# Altium PCB MachSacXa.PcbDoc
Units mil, origin at the board's own origin, x right, y up, seen from the top; angles counter-clockwise.
Board outline 8360 x 2835 mil, 2 copper layers (Top Layer, Bottom Layer); 169 components, 94 nets, 467 pads, 229 vias.
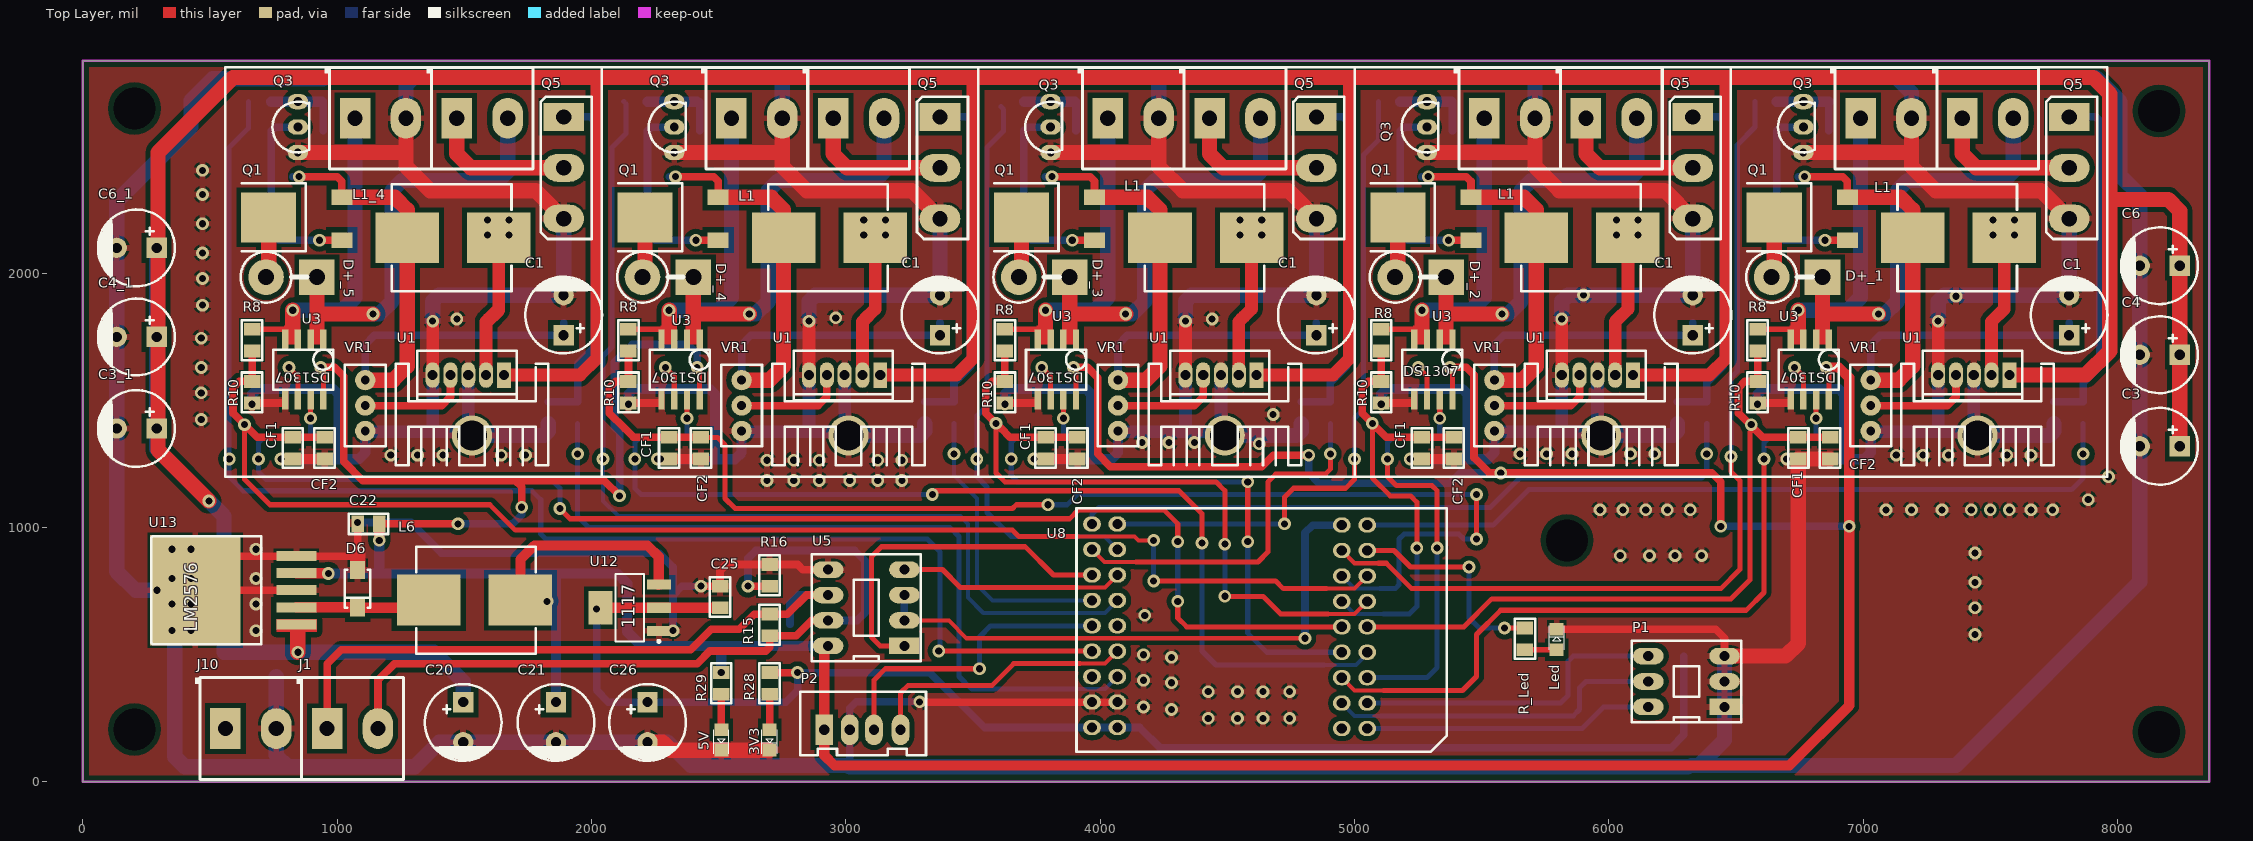
[diagram p0: Top Layer view]
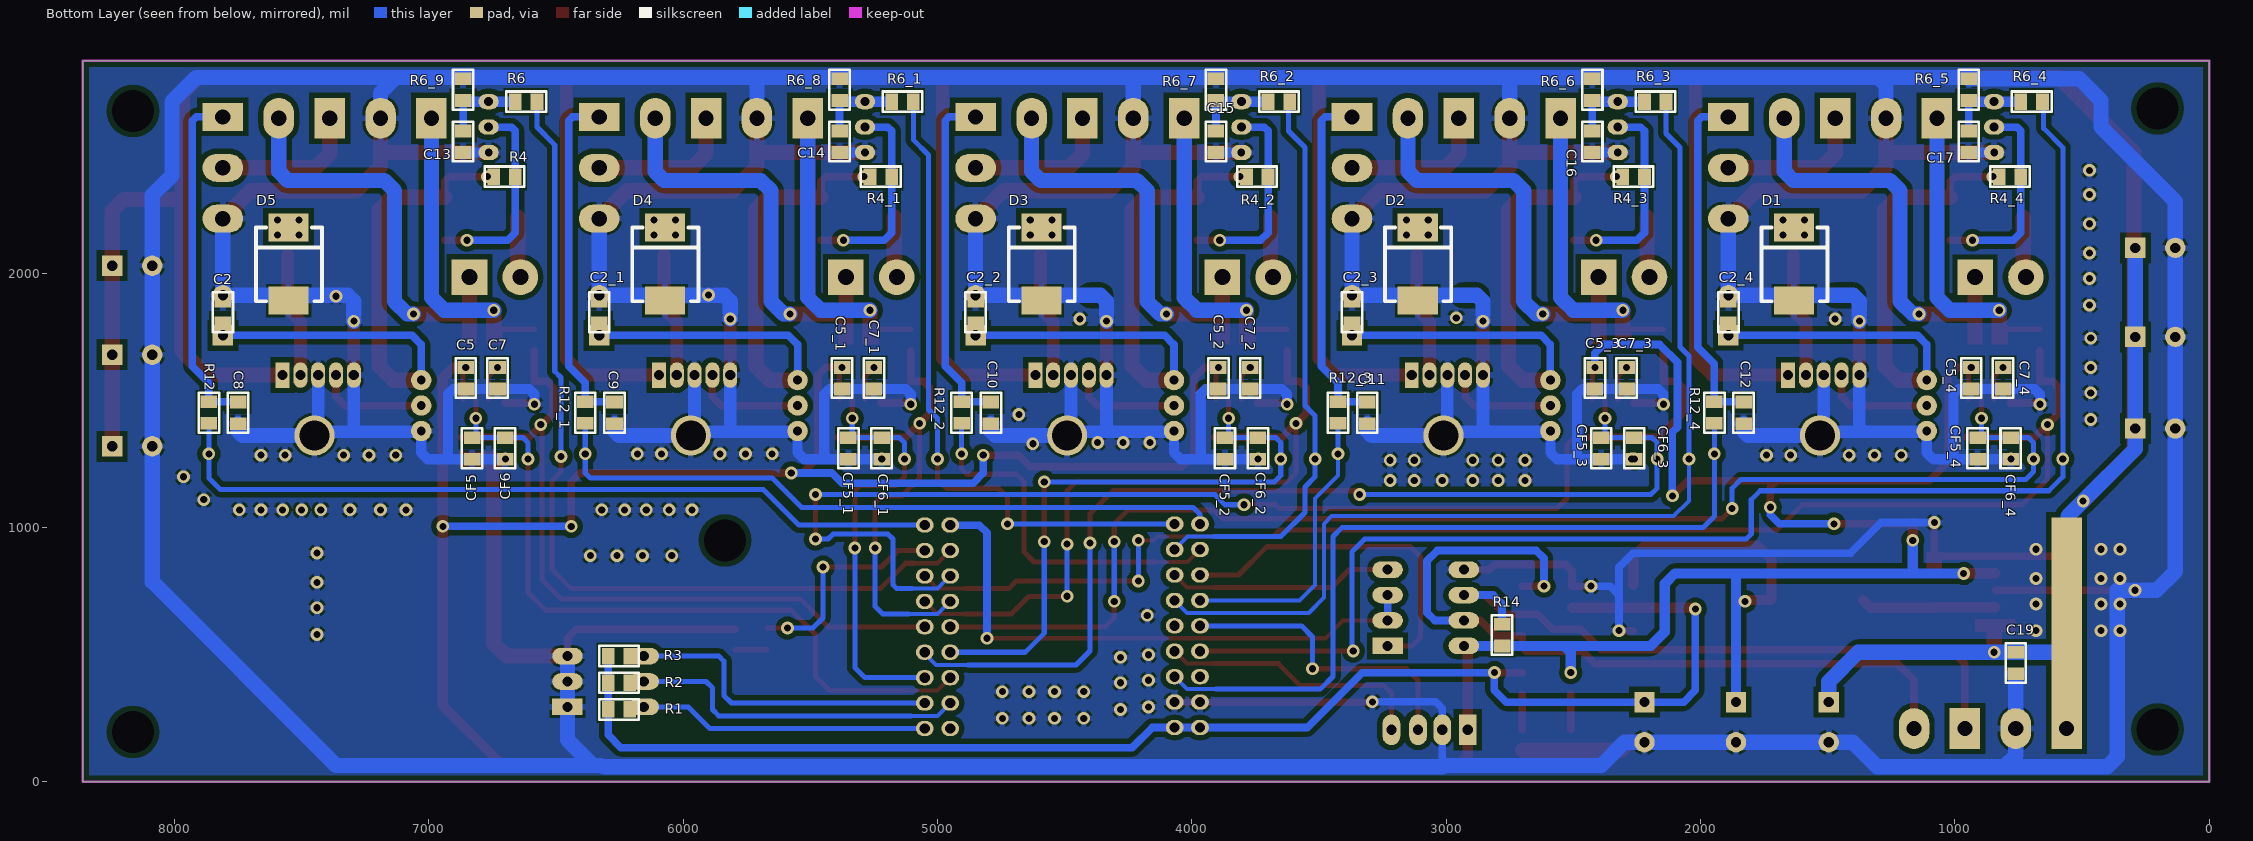
[diagram p1: Bottom Layer view, seen from below]
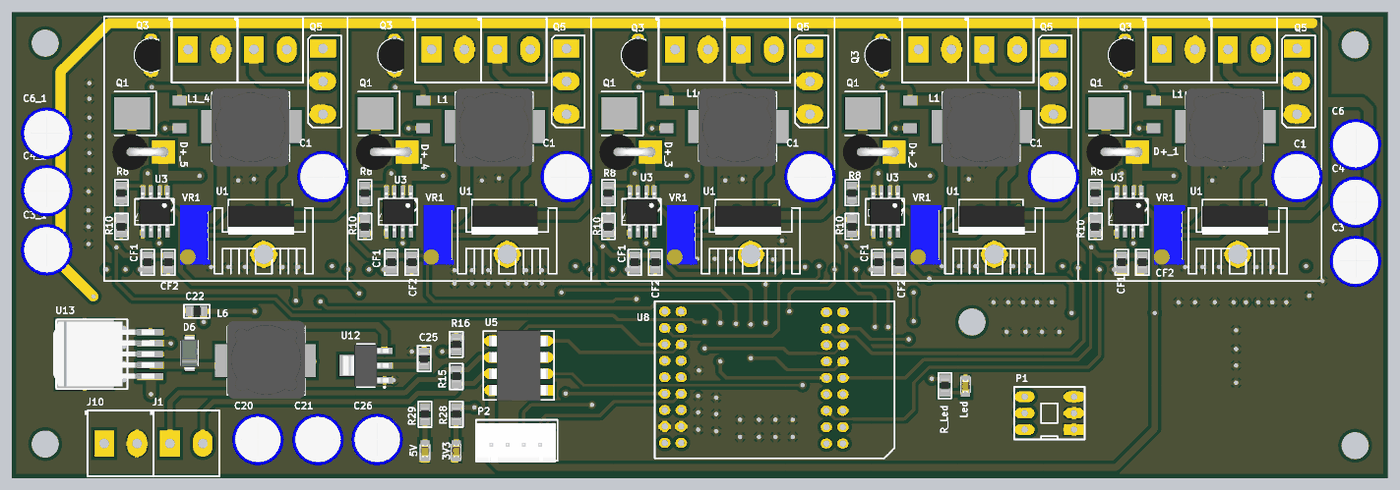
[diagram p2: 3D render of the assembled board from above, using the file's embedded part models]
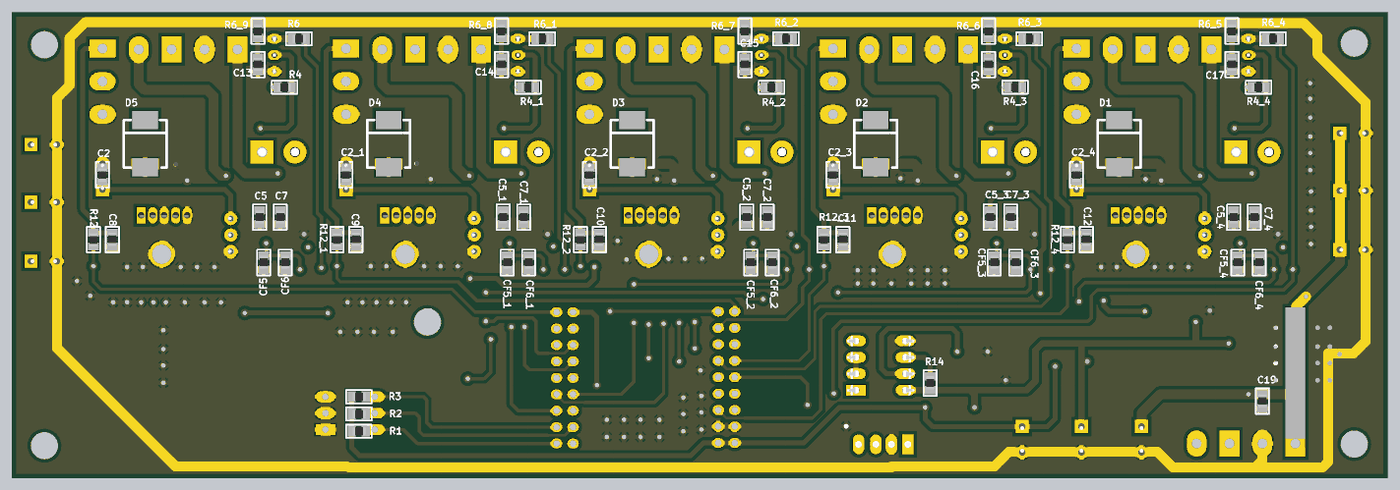
[diagram p3: 3D render of the assembled board from below, using the file's embedded part models]

## Layer stack, top to bottom
Top Solder: solder mask 0.4, Solder Resist, Dk 3.5
Top Layer: signal copper 1.4
Dielectric1: dielectric 12.6, FR-4, Dk 4.8
Bottom Layer: signal copper 1.4
Bottom Solder: solder mask 0.4, Solder Resist, Dk 3.5

## Board outline
0,2835 8360,2835 8360,0 0,0

## Design rules (kind name [scope] priority, off if disabled: settings)
Clearance [All] p1: gap=20 ignorepadtopadclearanceinfootprint=FALSE
PlaneConnect [All] p1: planeconnectstyle=Relief reliefexpansion=20 reliefentries=4 reliefconductorwidth=20 reliefairgap=10
PolygonConnect [All] p1: connectstyle=Relief reliefconductorwidth=25 reliefentries=4 polygonreliefangle="90 Angle" airgapwidth=10
RoutingVias [All] p1: holewidth=28 width=50 viastyle="Through Hole" minholewidth=28 minwidth=50 maxholewidth=28 maxwidth=50
SilkToSolderMaskClearance SilkscreenOverComponentPads [IsPad] p1: minsilkscreentomaskgap=10 clearancetoexposedcopper=TRUE
SolderMaskExpansion [All] p1: expansion=4
Width [All] p1: maxlimit=120 minlimit=14 preferedwidth=20
28 further rules are at their usual default settings.

## Classes and differential pairs
component class MachSacXa: C1 C2 C5 C7 C19 C20 C21 C22 C25 C26 CF1 CF2 CF5 CF6 D6 J1 J10 L1 L6 P1 P2 Q1 Q3 Q5 R1 R2 R3 R4 R6 R8 R10 R12 R14 R15 R16 R28 R29 U1 U3 U5 U8 U12 U13 VR1

## Components (designator, comment, footprint, x,y, rotation, side; value= is the part's Value field where it differs from the comment)
3V3 "LED" "LED_SMD (0805)" 2700,205 r270 top (schematic designator D7)
5V "LED" "LED_SMD (0805)" 2510,205 r270 top (schematic designator D8)
C1 "" C_D300 7810,1835 r90 top
C1 "" C_D300 6330,1835 r90 top
C1 "" C_D300 4850,1835 r90 top
C1 "" C_D300 3370,1835 r90 top
C1 "" C_D300 1890,1835 r90 top
C2 "104" R/C_0805 7810,1805 r90 bottom
C2_1 "104" R/C_0805 6330,1805 r90 bottom (schematic designator C2)
C2_2 "104" R/C_0805 4850,1805 r90 bottom (schematic designator C2)
C2_3 "104" R/C_0805 3370,1805 r90 bottom (schematic designator C2)
C2_4 "104" R/C_0805 1890,1805 r90 bottom (schematic designator C2)
C3 "" C_D300 8166.26,1320 r180 top (schematic designator C1)
C3_1 "" C_D300 211.26,1390 r180 top (schematic designator C1)
C4 "" C_D300 8166.26,1680 r180 top (schematic designator C1)
C4_1 "" C_D300 211.26,1750 r180 top (schematic designator C1)
C5 "104" R/C_0805 6855,1630 r270 bottom
C5_1 "104" R/C_0805 5375,1630 r270 bottom (schematic designator C5)
C5_2 "104" R/C_0805 3895,1630 r270 bottom (schematic designator C5)
C5_3 "104" R/C_0805 2415,1630 r270 bottom (schematic designator C5)
C5_4 "104" R/C_0805 935,1630 r270 bottom (schematic designator C5)
C6 "" C_D300 8166.26,2030 r180 top (schematic designator C1)
C6_1 "" C_D300 211.26,2100 r180 top (schematic designator C1)
C7 "104" R/C_0805 6730,1630 r270 bottom
C7_1 "104" R/C_0805 5250,1630 r270 bottom (schematic designator C7)
C7_2 "104" R/C_0805 3770,1630 r270 bottom (schematic designator C7)
C7_3 "104" R/C_0805 2290,1630 r270 bottom (schematic designator C7)
C7_4 "104" R/C_0805 810,1630 r270 bottom (schematic designator C7)
C8 "104" R/C_0805 7750,1493.74 r270 bottom (schematic designator C2)
C9 "104" R/C_0805 6270,1493.74 r270 bottom (schematic designator C2)
C10 "104" R/C_0805 4790,1493.74 r270 bottom (schematic designator C2)
C11 "104" R/C_0805 3310,1493.74 r270 bottom (schematic designator C2)
C12 "104" R/C_0805 1830,1493.74 r270 bottom (schematic designator C2)
C13 "104" R/C_0805 6865,2560 r270 bottom (schematic designator C2)
C14 "104" R/C_0805 5385,2560 r270 bottom (schematic designator C2)
C15 "104" R/C_0805 3905,2560 r270 bottom (schematic designator C2)
C16 "104" R/C_0805 2425,2560 r270 bottom (schematic designator C2)
C17 "104" R/C_0805 945,2560 r270 bottom (schematic designator C2)
C19 "104" R/C_0805 760,510 r270 bottom
C20 "" C_D300 1495,235 r270 top
C21 "" C_D300 1860,235 r270 top
C22 "104" R/C_0805 1165,1015 r180 top
C25 "104" R/C_0805 2505,685 r90 top
C26 "" C_D300 2220,235 r270 top
CF1 "104" R/C_0805 6745,1355 r270 top
CF1 "104" R/C_0805 5265,1355 r270 top
CF1 "104" R/C_0805 3785,1355 r270 top
CF1 "104" R/C_0805 2305,1355 r270 top
CF1 "104" R/C_0805 825,1355 r270 top
CF2 "105" R/C_0805 6870,1355 r270 top
CF2 "105" R/C_0805 5390,1355 r270 top
CF2 "105" R/C_0805 3910,1355 r270 top
CF2 "105" R/C_0805 2430,1355 r270 top
CF2 "105" R/C_0805 950,1355 r270 top
CF5 "104" R/C_0805 6830,1354 r270 bottom
CF5_1 "104" R/C_0805 5350,1354 r270 bottom (schematic designator CF5)
CF5_2 "104" R/C_0805 3870,1354 r270 bottom (schematic designator CF5)
CF5_3 "104" R/C_0805 2390,1354 r270 bottom (schematic designator CF5)
CF5_4 "104" R/C_0805 910,1354 r270 bottom (schematic designator CF5)
CF6 "105" R/C_0805 6700,1354 r270 bottom
CF6_1 "105" R/C_0805 5220,1354 r270 bottom (schematic designator CF6)
CF6_2 "105" R/C_0805 3740,1354 r270 bottom (schematic designator CF6)
CF6_3 "105" R/C_0805 2260,1354 r270 bottom (schematic designator CF6)
CF6_4 "105" R/C_0805 780,1354 r270 bottom (schematic designator CF6)
D1 "Diode 1N5822" Diot-2A 1600,2180 r270 bottom
D2 "Diode 1N5822" Diot-2A 3080,2180 r270 bottom (schematic designator D1)
D3 "Diode 1N5822" Diot-2A 4560,2180 r270 bottom (schematic designator D1)
D4 "Diode 1N5822" Diot-2A 6040,2180 r270 bottom (schematic designator D1)
D5 "Diode 1N5822" Diot-2A 7520,2180 r270 bottom (schematic designator D1)
D6 "Diode 1N5822" Diode_1A 1080,715 r90 top
D+_1 "Diode 1N5822" D_5A_() 6640,1985 r0 top
D+_2 "Diode 1N5822" D_5A_() 5160,1985 r0 top (schematic designator D+_1)
D+_3 "Diode 1N5822" D_5A_() 3680,1985 r0 top (schematic designator D+_1)
D+_4 "Diode 1N5822" D_5A_() 2200,1985 r0 top (schematic designator D+_1)
D+_5 "Diode 1N5822" D_5A_() 720,1985 r0 top (schematic designator D+_1)
J1 "VCC" HEADER1_2(400) 960,210 r0 top
J2 "VCC" HEADER1_2(400) 7390,2610 r0 top
J2 "VCC" HEADER1_2(400) 5910,2610 r0 top
J2 "VCC" HEADER1_2(400) 4430,2610 r0 top
J2 "VCC" HEADER1_2(400) 2950,2610 r0 top
J2 "VCC" HEADER1_2(400) 1470,2610 r0 top
J4 "VCC" HEADER1_2(400) 6990,2610 r0 top
J4 "VCC" HEADER1_2(400) 5510,2610 r0 top
J4 "VCC" HEADER1_2(400) 4030,2610 r0 top
J4 "VCC" HEADER1_2(400) 2550,2610 r0 top
J4 "VCC" HEADER1_2(400) 1070,2610 r0 top
J10 "VCC" HEADER1_2(400) 560,210 r0 top
L1 "Inductor" Cuon_cam(100mH) 7555,2140 r180 top
L1 "Inductor" Cuon_cam(100mH) 6075,2140 r180 top
L1 "Inductor" Cuon_cam(100mH) 4595,2140 r180 top
L1 "Inductor" Cuon_cam(100mH) 3115,2140 r180 top
L1_4 "Inductor" Cuon_cam(100mH) 1635,2140 r180 top (schematic designator L1)
L6 "Inductor" Cuon_cam(100mH) 1360,715 r0 top
Led "LED" "LED_SMD (0805)" 5795,520 r90 top (schematic designator LedFlick1)
P1 "Header 3X2" DIP6_300 6455,295 r180 top
P2 "Header 4" CON-Trang1_4 2915,205 r0 top
Q1 "NPN_ECB" AOD4185 6670,2220 r90 top
Q1 "NPN_ECB" AOD4185 5190,2220 r90 top
Q1 "NPN_ECB" AOD4185 3710,2220 r90 top
Q1 "NPN_ECB" AOD4185 2230,2220 r90 top
Q1 "NPN_ECB" AOD4185 750,2220 r90 top
Q3 "TR_NPN_ECB" C1815/C945 6765,2475 r90 top
Q3 "TR_NPN_ECB" C1815/C945 5285,2475 r90 top
Q3 "TR_NPN_ECB" C1815/C945 3805,2475 r90 top
Q3 "TR_NPN_ECB" C1815/C945 2325,2475 r90 top
Q3 "TR_NPN_ECB" C1815/C945 845,2475 r90 top
Q5 "TR_NPN_D718" D718 7810,2615 r270 top
Q5 "TR_NPN_D718" D718 6330,2615 r270 top
Q5 "TR_NPN_D718" D718 4850,2615 r270 top
Q5 "TR_NPN_D718" D718 3370,2615 r270 top
Q5 "TR_NPN_D718" D718 1890,2615 r270 top
R1 "" R/C_0805 6210,285 r0 bottom
R2 "" R/C_0805 6210,390 r0 bottom
R3 "" R/C_0805 6210,495 r0 bottom
R4 "" R/C_0805 6745,2380 r180 bottom
R4_1 "" R/C_0805 5265,2380 r180 bottom (schematic designator R4)
R4_2 "" R/C_0805 3785,2380 r180 bottom (schematic designator R4)
R4_3 "" R/C_0805 2305,2380 r180 bottom (schematic designator R4)
R4_4 "" R/C_0805 825,2380 r180 bottom (schematic designator R4)
R6 "" R/C_0805 6575,2675 r0 bottom
R6_1 "" R/C_0805 5095,2675 r0 bottom (schematic designator R6)
R6_2 "" R/C_0805 3615,2675 r0 bottom (schematic designator R6)
R6_3 "" R/C_0805 2135,2675 r0 bottom (schematic designator R6)
R6_4 "" R/C_0805 655,2675 r0 bottom (schematic designator R6)
R6_5 "" R/C_0805 945,2680 r90 bottom (schematic designator R6)
R6_6 "" R/C_0805 2425,2680 r90 bottom (schematic designator R6)
R6_7 "" R/C_0805 3905,2680 r90 bottom (schematic designator R6)
R6_8 "" R/C_0805 5385,2680 r90 bottom (schematic designator R6)
R6_9 "" R/C_0805 6865,2680 r90 bottom (schematic designator R6)
R8 "" R/C_0805 6585,1695 r90 top
R8 "" R/C_0805 5105,1695 r90 top
R8 "" R/C_0805 3625,1695 r90 top
R8 "" R/C_0805 2145,1695 r90 top
R8 "" R/C_0805 665,1695 r90 top
R10 "" R/C_0805 6585,1490 r90 top
R10 "" R/C_0805 5105,1490 r90 top
R10 "" R/C_0805 3625,1490 r90 top
R10 "" R/C_0805 2145,1490 r90 top
R10 "" R/C_0805 665,1490 r90 top
R12 "" R/C_0805 7865,1410 r90 bottom
R12_1 "" R/C_0805 6385,1410 r90 bottom (schematic designator R12)
R12_2 "" R/C_0805 4905,1410 r90 bottom (schematic designator R12)
R12_3 "" R/C_0805 3425,1410 r90 bottom (schematic designator R12)
R12_4 "" R/C_0805 1945,1410 r90 bottom (schematic designator R12)
R14 "Res1" R/C_0805 2780,620 r270 bottom
R15 "Res1" R/C_0805 2700,660 r270 top
R16 "Res1" R/C_0805 2700,855 r270 top
R28 "" R/C_0805 2700,430 r270 top
R29 "" R/C_0805 2510,430 r270 top
R_Led "" R/C_0805 5670,605 r270 top (schematic designator R_LedFlick1)
U1 "LM2576S-5" LM2576(1) 7530,1600 r180 top
U1 "LM2576S-5" LM2576(1) 6050,1600 r180 top
U1 "LM2576S-5" LM2576(1) 4570,1600 r180 top
U1 "LM2576S-5" LM2576(1) 3090,1600 r180 top
U1 "LM2576S-5" LM2576(1) 1610,1600 r180 top
U3 "ACS712" DS1307 6865,1700 r180 top
U3 "ACS712" DS1307 5385,1700 r180 top
U3 "ACS712" DS1307 3905,1700 r180 top
U3 "ACS712" DS1307 2425,1700 r180 top
U3 "ACS712" DS1307 945,1700 r180 top
U5 "MAX485" DIP8_300 3230,535 r180 top
U8 "STM32F103_C8T6_Adapter" Dip36(9x4) 4950,210 r90 top
U12 "AMS1117_3.3V" AMS1117_(SOT_223) 2150,685 r180 top
U13 "LM2576S-5" LM2576 780,620 r90 top
VR1 "Bien tro" VR_3 7030,1380 r90 top
VR1 "Bien tro" VR_3 5550,1380 r90 top
VR1 "Bien tro" VR_3 4070,1380 r90 top
VR1 "Bien tro" VR_3 2590,1380 r90 top
VR1 "Bien tro" VR_3 1110,1380 r90 top

## Footprints (in the part's own frame and the unit in brackets; to place one, negate y for a bottom-side part, rotate by r counter-clockwise, add the part's x,y. Pads: shape width x height; smd on the part's side, far side on the other; paste and mask are expansions set on the pad)
AMS1117_(SOT_223) [mm] "SOT223, 4-Leads, Body 6.5x3.5mm, Pitch 2.3mm, Lead Span 7mm, IPC Medium Density"
  rect 2.4x1 smd: 1(-2.9,2.3) 2(-2.9,0) 3(-2.9,-2.3)
  rect 2.4x3.3 smd: 2(2.9,0)
  silkscreen extent -3.03,-3.35 1.4,3.47, body extent -3.5,-3.25 3.5,3.25, height 1.65
AOD4185 [mm]
  rect 1.524x2.1 smd: 1(-2.28,-6.8) 3(2,-6.8)
  rect 5x5.5 smd: 2(0,0.5)
  silkscreen extent -3.4,-3.2 3.4,3.2
C1815/C945 [mil]
  oval 60x80 hole 30: 1(0,0)
  oval 60x80 hole 35: 2(100,0) 3(200,0)
  silkscreen extent 0,-45 200,100, body extent -9,-61 209,100, height 285
C_D300 [mil] "D = 250mil"
  rect 80x80 hole 40: 1(-78.74,0)
  round 80 hole 40: 2(78.74,0)
  silkscreen extent -150,-151 155,151, body extent -158,-158 158,158, height 473
CON-Trang1_4 [mil]
  rect 70x120 hole 40: 1(0,0)
  oval 70x120 hole 40: 2(100,0) 3(195,0) 4(300,0)
  silkscreen extent -95,-100 400,150, body extent -98,-110 390,130, height 290
Cuon_cam(100mH) [mil]
  rect 250x200 smd: 1(0,0) 2(360,0)
  silkscreen extent -50,-210 420,210, body extent -51,-231 421,241, height 318
D718 [mil]
  rect 110x160 hole 60: 1(0,0)
  oval 110x160 hole 60: 2(200,0) 3(400,0)
  silkscreen extent -80,-91 480,110
D_5A_() [mil]
  round 140 hole 62.99: 1(0,0)
  rect 140x140 hole 62.99: 2(200,0)
  silkscreen extent -100,-100 160,100, body extent -110,-110 226,110, height 618
Diode_1A [mil] "Capacitor SMD 120x60mil"
  rect 70x59.06 smd: 1(118.11,0) 2(-30,0)
  silkscreen extent -30,-50 120,50, body extent -57,-50 147,52, height 95
Diot-2A [mil]
  rect 110.23x157.47 smd: 1(287.43,-31.5) 2(0,-31.5)
  silkscreen extent 0,-160 290,100
DIP6_300 [mil]
  rect 120x65 hole 40: 1(0,0)
  oval 120x65 hole 40: 2(0,-100) 3(0,-200) 4(300,-200) 5(300,-100) 6(300,0)
  silkscreen extent -65,-260 365,60
DIP8_300 [mil]
  rect 120x65 hole 40: 1(0,0)
  oval 120x65 hole 40: 2(0,-100) 3(0,-200) 4(0,-300) 5(300,-300) 6(300,-200) 7(300,-100) 8(300,0)
  silkscreen extent -65,-360 365,60, body extent -55,-366 355,67, height 145
Dip36(9x4) [mil]
  oval 60x70 hole 40: 1(0,0) 2(0,-100) 3(100,0) 4(100,-100) 5(200,0) 6(200,-100) 7(300,0) 8(300,-100) 9(400,0) 10(400,-100) 11(500,0) 12(500,-100) 13(600,0) 14(600,-100) 15(700,0) 16(700,-100) 17(800,0) 18(800,-100) 19(803.94,882.68) 20(803.94,982.68) 21(703.94,882.68) 22(703.94,982.68) 23(603.94,882.68) 24(603.94,982.68) 25(503.94,882.68) 26(503.94,982.68) 27(403.94,882.68) 28(403.94,982.68) 29(303.94,882.68) 30(303.94,982.68) 31(203.94,882.68) 32(203.94,982.68) 33(103.94,882.68) 34(103.94,982.68) 35(3.94,882.68) 36(3.94,982.68)
  silkscreen extent -91,-413 866,1043
DS1307 [mm]
  rect 0.635x2.032 smd: 1(0,-1)
  rect 0.635x2.03 smd: 2(1.27,-1)
  rect 0.635x2 smd: 3(2.54,-1) 4(3.81,-1) 5(3.81,5) 6(2.54,5) 7(1.27,5) 8(0,5)
  silkscreen extent -1,0 5,4, body extent -0.51,-1.02 4.39,4.98, height 1.75
HEADER1_2(400) [mil]
  rect 120x160 hole 60: 1(0,0)
  oval 120x160 hole 60: 2(200,0)
  silkscreen extent -120,-200 300,200
"LED_SMD (0805)" [mil]
  rect 50x55 smd: 1(0,0)
  rect 50x55.12 smd: 2(80,0)
  silkscreen extent 0,-30 95,30, body extent 0,-24 80,25, height 43
LM2576 [mm]
  rect 1x4 smd: 1(0,-1.5) 2(1.7,-1.5) 3(3.4,-1.5) 4(5.1,-1.5) 5(6.8,-1.5)
  rect 11x9 smd: ""(3.4,8.6)
  silkscreen extent -2,2 8.8,13, body extent -1.57,-2.2 8.43,13.47, height 4.83
LM2576(1) [mil]
  round 157.48 hole 118.11: 0(80,237.48)
  rect 55x100 hole 40: 1(-45,0)
  oval 55x100 hole 40: 2(25,0) 3(95,0) 4(165,0) 5(235,0)
  silkscreen extent -220,-95 380,355, body extent -105,-77 295,117, height 800
R/C_0805 [mil]
  rect 50x65 smd: 1(0,0) 2(85,0)
  silkscreen extent -36,-40 120,40, body extent 1,-24 79,25, height 22
VR_3 [mil] "Bien tro dien dung"
  round 80 hole 35: 1(0,0) 2(100,0) 3(200,0)
  silkscreen extent -60,-80 260,80, body extent -81,-100 281,89, height 479

## Part data
3V3 5V Led: library part LED0, "Typical INFRARED GaAs LED"
C1 C1 C1 C1 C1 C3 C3_1 C4 C4_1 C6 C6_1 C20 C21 C26: library part Cap2, "Capacitor"
C2 C2_1 C2_2 C2_3 C2_4 C5 C5_1 C5_2 C5_3 C5_4 C7 C7_1 C7_2 C7_3 C7_4 C8 C9 C10 C11 C12 C13 C14 C15 C16 C17 C19 C22 C25 CF1 CF1 CF1 CF1 CF1 CF2 CF2 CF2 CF2 CF2 CF5 CF5_1 CF5_2 CF5_3 CF5_4 CF6 CF6_1 CF6_2 CF6_3 CF6_4: library part Cap, "Capacitor"
D1 D2 D3 D4 D5 D6 D+_1 D+_2 D+_3 D+_4 D+_5: library part "Diode 1N4004", "1 Amp General Purpose Rectifier"
J1 J2 J2 J2 J2 J2 J4 J4 J4 J4 J4 J10: library part "Header 2", "Header, 2-Pin"
P1: "Header, 3-Pin, Dual row"
P2: "Header, 4-Pin"
Q1 Q1 Q1 Q1 Q1: library part TR_PNP_ECB
R1 R2 R3 R4 R4_1 R4_2 R4_3 R4_4 R6 R6_1 R6_2 R6_3 R6_4 R6_5 R6_6 R6_7 R6_8 R6_9 R8 R8 R8 R8 R8 R10 R10 R10 R10 R10 R12 R12_1 R12_2 R12_3 R12_4 R28 R29 R_Led: library part Res2, "Resistor"
R14 R15 R16: "Resistor"
U1 U1 U1 U1 U1 U13: library part LM2576S-5.0, "Simple Switcher 3A Step Down Voltage Regulator"
U8: library part STM32_C8T6_Adapter
VR1 VR1 VR1 VR1 VR1: library part VR

## Free pads (board coordinates)
  round 60 hole 165.35: 0(201.85,2648.15) 1(8163.15,2638.15) 2(5835,950) 2(8163.15,196.85) 3(201.85,206.85)
  rect 120x800 smd far side: 0(560,640)
  rect 120x800 on Bottom Solder: 0(560,640)

## Via types
v1: diameter 50, hole 28, Top Layer to Bottom Layer, tented both sides, 229 vias

## Nets (pads, with @x,y where several pads share a name; then routed paths per layer and width w, separated by ;. In a path a pad name is that pad's centre, name@x,y a point inside that pad or via, vN(x,y) a via of type N, cw(c..) or ccw(c..) an arc to the next point about the centre after c; other vN are vias at no path point)
A: J1.1 R14.1 R15.1 U5.6 | length 2581.3
  Top Layer w30: J1.1 960,465 1015,520 2390,520 2470,600 2580,600 2640,660 R15.1 2770,660 2845,735 U5.6
  Bottom Layer w30: R14.1 2780,700 2815,735 U5.6
B: J1.2 R15.2 R16.2 U5.7 | length 3130.1
  Top Layer w30: J1.2 1160,400 1225,465 2415,465 2465,515 2685,515 2700,530 R15.2 2805,575 2865,635 U5.7 ; v1(2615,770) R16.2
  Bottom Layer w30: v1(2615,770) 2615,880 2645,910 3035,910 3075,870 3075,665 3045,635 U5.7
DIR: U5.2 U5.3 U8.17 | length 2276.4
  Top Layer w16: U5.2 3405,635 3475,565 v1(4805,565)
  Bottom Layer w30: U5.2 U5.3 ; v1(4805,565) 4805,980 4835,1010 U8.17
GND: 3V3.2 5V.2 C1.2 C2.2 C2_1.2 C2_2.2 C2_3.2 C2_4.2 C3.2 C3_1.2 C4.2 C4_1.2 C5.2 C5_1.2 C5_2.2 C5_3.2 C5_4.2 C6.2 C6_1.2 C7.2 C7_1.2 C7_2.2 C7_3.2 C7_4.2 C8.2 C9.2 C10.2 C11.2 C12.2 C13.2 C14.2 C15.2 C16.2 C17.2 C19.2 C20.2 C21.2 C22.2 C25.2 C26.2 CF1.2 CF2.2 CF5.2 CF5_1.2 CF5_2.2 CF5_3.2 CF5_4.2 CF6.2 CF6_1.2 CF6_2.2 CF6_3.2 CF6_4.2 D1.1 D2.1 D3.1 D4.1 D5.1 D6.1 J4.2 J10.2 Led.2 P1.1 P1.2 P1.3 P2.2 Q3.1 Q5.3 R6_5.2 R6_6.2 R6_7.2 R6_8.2 R6_9.2 R10.1 R16.1 U1.0 U1.3 U1.5 U3.5 U5.5 U8.33 U8.34 U12.1 U13. U13.3 U13.5 VR1.1 | length 54584.1
  Top Layer w30: v1(291.14,753.86) U13. U13.3 ; U13.@575.28,887.72 U13.5 1080,887.72 ; R10.1@665,1490 781.85,1490 ; D6.1 1080,887.72 ; C22.2 1080,887.72 ; R10.1@2145,1490 2261.85,1490 ; U12.1 2319.45,594.45 v1(2320,595) ; v1(2430,770) C25.2 2505,830 2530,855 R16.1 2810,855 2830,835 U5.5 ; v1(3290,315) 3291.06,313.94 U8.34 U8.33 ; R10.1@3625,1490 3741.85,1490 ; R10.1@5105,1490 5221.85,1490 ; Led.2 6420,600 6455,565 P1.3 ; R10.1@6585,1490 6701.85,1490
  Top Layer w40: CF1.2@825,1270 CF2.2@950,1270 ; CF1.2@2305,1270 CF2.2@2430,1270 ; CF1.2@3785,1270 CF2.2@3910,1270 ; CF1.2@5265,1270 CF2.2@5390,1270 ; v1(6699,1270) CF1.2@6745,1270
  Top Layer w50: U1.5@1375,1600 v1(1375,1811.89) ; U1.5@2855,1600 v1(2855,1811.89) ; U1.5@4335,1600 v1(4335,1811.89) ; U1.5@5815,1600 v1@5815,1811.89 ; U1.5@7295,1600 v1(7295,1811.89)
  Top Layer w60: Q3.1@845,2475 1265,2475 ; J4.2@1270,2610 1270,2480 ; Q5.3@1890,2215 1780,2325 1365,2325 1270,2420 1270,2480 ; C26.2 2278.74,156.26 2310,125 5V.2 3V3.2 ; Q3.1@2325,2475 2745,2475 ; J4.2@2750,2610 2750,2480 ; Q5.3@3370,2215 3260,2325 2845,2325 2750,2420 2750,2475 ; Q3.1@3805,2475 4230,2475 ; J4.2@4230,2610 4230,2485 4230,2475 ; Q5.3@4850,2215 4740,2325 4325,2325 4230,2420 4230,2475 ; Q3.1@5285,2475 5710,2475 ; J4.2@5710,2610 5710,2475 ; Q5.3@6330,2215 6220,2325 5805,2325 5710,2420 5710,2475 ; P1.3 6695,495 6745,545 6745,1270 CF2.2@6870,1270 ; Q3.1@6765,2475 7185,2475 7190,2480 ; J4.2@7190,2610 7190,2480 ; Q5.3@7810,2215 7700,2325 7285,2325 7190,2420 7190,2480 ; 1265,2475 1270,2480 ; 1265,2475 1270,2480 ; 2745,2475 2750,2475 ; 2745,2475 2750,2480 ; 2750,2475 2750,2480
  Bottom Layer w30: v1(1080,1020) 1290,1020 1410,900 2265,900 2320,845 2320,735 ; v1(2320,595) 2320,735 ; v1(2430,770) 2355,770 2320,735 ; 3015,65 P2.2 3015,290 3040,315 v1(3290,315)
  Bottom Layer w40: v1(665,1485) 665,1525 685,1545 C7_4.2 C5_4.2 985,1545 1005,1525 1005,1269 ; CF6_4.2 CF5_4.2 1005,1269 ; Q3.1@845,2475 C17.2 ; VR1.1@1110,1380 1110,1295 1084,1269 1005,1269 ; v1(2145,1485) 2145,1525 2165,1545 C7_3.2 C5_3.2 2465,1545 2485,1525 2485,1269 ; CF6_3.2 CF5_3.2 2485,1269 ; Q3.1@2325,2475 C16.2 ; VR1.1@2590,1380 2590,1295 2564,1269 2485,1269 ; v1(3625,1485) 3625,1525 3645,1545 C7_2.2 C5_2.2 ; CF6_2.2 CF5_2.2 3965,1269 ; Q3.1@3805,2475 C15.2 ; 3945,1545 3965,1525 3965,1269 ; VR1.1@4070,1380 4070,1295 4044,1269 3965,1269 ; v1(5105,1485) 5105,1525 5125,1545 C7_1.2 C5_1.2 5425,1545 5445,1525 5445,1269 ; CF6_1.2 CF5_1.2 5445,1269 ; Q3.1@5285,2475 C14.2 ; VR1.1@5550,1380 5550,1295 5524,1269 5445,1269 ; v1(6585,1485) 6585,1525 6605,1545 C7.2 C5.2 6905,1545 6925,1525 6925,1269 ; CF6.2 CF5.2 6925,1269 ; Q3.1@6765,2475 C13.2 ; VR1.1@7032.48,1377.52 7030,1380 7030,1295 7004,1269 6925,1269
  Bottom Layer w50: VR1.1@1112.48,1377.52 1375,1377.52 ; U1.5@1375,1600 1375,1377.52 ; U1.3@1515,1600 1515,1377.52 1375,1377.52 ; VR1.1@2592.48,1377.52 2855,1377.52 ; U1.5@2855,1600 2855,1377.52 ; U1.3@2995,1600 2995,1377.52 2855,1377.52 ; VR1.1@4072.48,1377.52 4335,1377.52 ; U1.5@4335,1600 4335,1377.52 ; U1.3@4475,1600 4475,1377.52 4335,1377.52 ; VR1.1@5552.48,1377.52 5815,1377.52 ; U1.5@5815,1600 5815,1377.52 ; U1.3@5955,1600 5955,1377.52 5815,1377.52 ; VR1.1@7032.48,1377.52 7295,1377.52 ; U1.5@7295,1600 7295,1377.52 ; U1.3@7435,1600 7435,1377.52 7295,1377.52
  Bottom Layer w60: C19.2@760,415 J10.2 760,105 805,60 ; R6_5.2@925,2770 1300,2770 ; R6_5.2 510,2765 425,2680 425,2575 132.52,2282.52 C6_1.2 C4_1.2 C3_1.2 132.52,827.48 206.14,753.86 v1(291.14,753.86) 361.14,753.86 361.14,98.86 400,60 805,60 ; J4.2@1270,2610 1270,2740 1300,2770 ; v1(1375,1811.89) 1375,1890 1398.74,1913.74 1890,1913.74 Q5.3@1890,2215 ; U1.0@1530,1362.52 1812.52,1362.52 1830,1380 C12.2 ; J4.2@2750,2610 2750,2765 ; v1(2855,1811.89) 2855,1890 2878.74,1913.74 3370,1913.74 Q5.3@3370,2215 ; U1.0@3010,1362.52 3292.52,1362.52 3310,1380 C11.2 ; 3015,60 6310,60 ; 3015,65 2390,65 2298.74,156.26 C26.2 C21.2 C20.2 1401.26,156.26 1305,60 805,60 ; J4.2@4230,2610 4230,2765 ; v1(4335,1811.89) 4335,1890 4358.74,1913.74 4850,1913.74 Q5.3@4850,2215 ; U1.0@4490,1362.52 4772.52,1362.52 4790,1380 C10.2 ; J4.2@5710,2610 5710,2765 ; v1(5815,1820) 5815,1890 5838.74,1913.74 6330,1913.74 Q5.3@6330,2215 ; U1.0@5970,1362.52 6252.52,1362.52 6270,1380 C9.2 ; 6325,65 6355,65 ; P1.3 P1.2 P1.1 6455,165 6355,65 ; J4.2@7190,2610 7190,2710 7130,2770 ; v1(7295,1811.89) 7295,1890 7318.74,1913.74 7810,1913.74 Q5.3@7810,2215 ; U1.0@7450,1362.52 7732.52,1362.52 7750,1380 C8.2 ; 1300,2770 7130,2770 ; 6355,65 7365,65 8087.52,787.52 C3.2 C4.2 C6.2 8087.52,2307.48 8010,2385 8010,2675 7915,2770 7130,2770
  other v1: 4425,250 4540,250 4640,250 4745,250 4280,285 4170,295 4425,355 4540,355 4640,355 4745,355 4280,390 4170,400 4280,490 4170,500 7440,580 350,595 425,595 680,595 4175,655 7440,685 350,700 425,700 680,700 7440,785 350,800 425,800 680,800 6045,890 6160,890 6260,890 6365,890 7440,900 350,915 425,915 680,915 5965,1070 6055,1070 6145,1070 6230,1070 6320,1070 7090,1070 7190,1070 7310,1070 7425,1070 7500,1070 7575,1070 7660,1070 7745,1070 7885,1110 2690,1185 2795,1185 2895,1185 3015,1185 3125,1185 3220,1185 7965,1200 2690,1265 2795,1265 2895,1265 3125,1265 3220,1265 779,1270 2270,1270 3739,1270 5219,1270 1210,1285 1315,1285 1415,1285 1645,1285 1740,1285 7130,1285 7235,1285 7335,1285 7565,1285 7660,1285 5650,1290 5755,1290 5855,1290 6085,1290 6180,1290 4625,1330 4165,1335 4270,1335 4370,1335 465,1425 4680,1445 465,1530 465,1630 465,1745 1470,1820 4440,1820 2960,1825 470,1875 7365,1910 5900,1915 470,1980 470,2080 470,2195 470,2310 470,2405
IN1: P1.6 R1.1 U8.2 | length 1140.2
  Bottom Layer w20: U8.2 5895,210 5980,295 P1.6
IN2: P1.5 R2.1 U8.3 | length 1331.4
  Bottom Layer w16: U8.3 5000,260 5105,260
  Bottom Layer w20: 5105,260 5860,260 5885,285 5885,370 5910,395 P1.5
IN3: P1.4 R3.1 U8.4 | length 1260.7
  Bottom Layer w20: U8.4 5810,310 5840,340 5840,475 5860,495 P1.4
IOUT_1: CF5.1 CF6.1 U3.7@6815,1503.15 U8.5 | length 2903.3
  Top Layer w16: U8.5 5000,360 5115,360
  Top Layer w20: 5115,360 5425,360 5480,415 5480,580 5575,675 6540,675 6610,745 v1(6610,1270) ; v1(6815,1430) U3.7@6815,1503.15
  Bottom Layer w20: v1(6610,1270) 6610,1334 6630,1354 CF6.1 CF5.1@6815,1354 ; v1(6815,1430) CF5.1@6815,1354 ; CF5.1 CF5.1@6815,1354
IOUT_2: U8.6 | length 1274.4
  Top Layer w20: v1(5130,1270) 5130,1200 5165,1165 5305,1165 5325,1145 v1(5325,920)
  Bottom Layer w20: U8.6 5285,410 5325,450 v1(5325,920)
IOUT_3: U8.7 | length 2001.4
  Top Layer w20: v1(4580,945) v1(4580,1180)
  Bottom Layer w20: v1(3650,1270) 3650,1205 3675,1180 v1(4580,1180) ; v1(4580,945) 4580,585 4655,510 U8.7
IOUT_4: U8.8 | length 3635.3
  Top Layer w20: v1(3340,1130) 3355,1145 4310,1145 4400,1055 v1(4400,940)
  Bottom Layer w16: 4880,460 5005,460 5050,505 U8.8
  Bottom Layer w20: v1(2170,1270) 2170,1155 2195,1130 v1(3340,1130) ; v1(4400,940) 4400,515 4455,460 4880,460
IOUT_5: U8.9 | length 4855.3
  Top Layer w20: v1(1875,1075) 1915,1035 3880,1035 3915,1070 4250,1070 4305,1015 v1(4305,945) ; v1(4305,710) 4305,645 4340,610 U8.9
  Bottom Layer w20: v1(690,1270) 690,1220 720,1190 1840,1190 1875,1155 v1(1875,1075) ; v1(4305,710) v1(4305,945)
NAP_1: R6.1 U8.15 | length 3552
  Top Layer w16: U8.15 5000,860 5095,860
  Top Layer w20: 5095,860 5125,860 5225,760 6440,760 6515,835 6515,1185 6480,1220 v1(6480,1280)
  Bottom Layer w20: v1(6480,1280) 6480,1590 6505,1615 6505,2505 6575,2575 R6.1
NAP_2: U8.19 | length 1147.1
  Top Layer w20: v1(4725,1015) 4725,1120 4760,1155 4965,1155 5000,1190 v1(5000,1270)
  Bottom Layer w20: U8.19 4068.39,1015 v1(4725,1015)
NAP_3: U8.21 | length 799.4
  Bottom Layer w16: 3915,965 4016.26,965 U8.21
  Bottom Layer w20: v1(3515,1270) 3515,1200 3555,1160 3555,1060 3650,965 3915,965
NAP_4: U8.25 | length 2529.7
  Bottom Layer w16: 2045,1240 2045,1105 2105,1045 3450,1045 3480,1015 3480,725 3540,665 4018.39,665 U8.25
  other v1: 2045,1270
NAP_5: U8.30 | length 4041.1
  Top Layer w20: v1(3365,515) 3966.26,515 U8.30
  Bottom Layer w20: v1@575,1250 575,1200 630,1145 1765,1145 1800,1110 1800,975 1820,955 3320,955 3370,905 3370,520 v1(3365,515)
  other v1: 575,1270
NetC7_1: C7.1 U3.6@6765,1503.15 | length 141.3
  Top Layer w20: v1(6730,1630) 6765,1595 U3.6@6765,1503.15
NetC8_1: 
NetC15_1: 
NetC16_1: 
NetC24_1: 
NetD1_2: D5.2 L1.1@7555,2140 U1.2@7505,1600 | length 495.7
  Top Layer w50: U1.2@7505,1600 7505,1810 7555,1860 L1.1@7555,2075
  other v1: 7510,2150 7595,2150 7510,2210 7595,2210
NetD2_2: 
NetD3_2: 
NetD4_2: 
NetD5_2: 
NetD6_2: D6.2 L6.1 U13.2 | length 534.2
  Top Layer w40: U13.2 1078.07,686.93 D6.2 1330,685 L6.1
NetD7_1: 3V3.1 R28.2 | length 140
  Top Layer w30: 3V3.1 R28.2
NetD8_1: 5V.1 R29.2 | length 140
  Top Layer w30: 5V.1 R29.2
NetD+_1_1: D+_1.1 Q1.2@6650.31,2220 | length 239.3
  Top Layer w60: D+_1.1 6650.31,1995.32 Q1.2@6650.31,2220
NetD+_1_2: D+_1.2 J2.2@7590,2610 U3.1@6865,1739.37 U3.2@6815,1739.37 | length 1645.9
  Top Layer w60: D+_1.2@6830,1980 6840,1970 6840,1840 ; 6840,1785 6840,1840 ; v1(7060,1840) 6840,1840
  Bottom Layer w60: v1(7060,1840) 7085,1840 7135,1890 7135,2325 7175,2365 7555,2365 7590,2400 J2.2@7590,2610
NetD+_2_1: 
NetD+_2_2: 
NetD+_3_1: 
NetD+_3_2: 
NetD+_4_1: 
NetD+_4_2: 
NetD+_5_1: 
NetD+_5_2: 
NetJ2_1: J2.1@7390,2610 Q5.2@7810,2415 | length 602.8
  Top Layer w60: J2.1@7390,2610 7390,2470 7445,2415 Q5.2@7830,2415
NetJ3_1: 
NetJ4_1: J4.1@6990,2610 R8.2@6585,1780 U3.3@6765,1739.37 U3.4@6715,1739.37 | length 1222.8
  Top Layer w20: R8.2@6585,1780 6735,1780
  Top Layer w60: 6740,1755 6745,1760 v1(6745,1855)
  Bottom Layer w60: v1(6745,1855) 6940,1855 6990,1905 J4.1@6990,2610
NetJ5_1: 
NetJ6_1: 
NetJ7_1: 
NetJ8_1: 
NetJ9_1: 
NetJ11_1: 
NetJ12_1: 
NetLedFlick1_1: Led.1 R_Led.2 | length 125
  Top Layer w20: R_Led.2 Led.1
NetQ1_1: Q1.1@6937.72,2130.24 Q3.2@6765,2575 R4.2 | length 801.5
  Top Layer w30: v1(6850,2130) 6850.24,2130.24 Q1.1@6937.72,2130.24
  Bottom Layer w30: Q3.2@6765,2575 6675,2575 6660,2560 R4.2 6660,2160 6690,2130 v1(6850,2130)
NetQ2_1: 
NetQ3_3: Q3.3@6765,2675 R6.2 R6_9.1 | length 257.5
  Bottom Layer w40: R6.2 Q3.3@6765,2675 ; 6712.5,2675 R6_9.1@6865,2675
NetQ4_3: 
NetQ5_1: Q5.1@7810,2615 R12.2 | length 1373.1
  Bottom Layer w30: 7750,1495 R12.2 7865,1570 7930,1635 7930,2600 7915,2615 Q5.1@7810,2615
NetQ6_1: 
NetQ7_1: 
NetQ8_1: 
NetQ9_3: 
NetQ10_3: 
NetQ11_1: 
NetQ12_1: 
NetQ13_1: 
NetQ14_3: 
NetQ15_1: 
NetR_LedFlick1_1: R_Led.1 U8.16 | length 863.5
  Top Layer w20: U8.16 5155,910 5220,845 v1(5450,845) ; v1(5590,605) R_Led.1
  Bottom Layer w20: v1(5450,845) 5450,645 5490,605 v1(5590,605)
NetU1_4: U1.4@7365,1600 VR1.2@7030,1480 | length 434.5
  Top Layer w30: VR1.2@7030,1480 7330,1480 7365,1515 U1.4@7365,1600
NetU2_4: 
NetU6_4: 
NetU7_4: 
NetU11_4: 
RX1: U5.1 U8.24 | length 1389.4
  Top Layer w20: U5.1 3135,535 3100,570 3100,885 3140,925 3705,925 3816.06,813.94 U8.24
SCL: P2.3 U8.28 | length 1214.2
  Top Layer w20: P2.3 3110,400 3155,445 v1(3525,445)
  Bottom Layer w20: v1(3525,445) 3525,570 3568.94,613.94 U8.28
SDA: P2.4 U8.29 | length 1065.2
  Top Layer w16: 3920,465 4018.39,465 U8.29
  Top Layer w20: P2.4 3215,350 3245,380 3575,380 3660,465 3920,465
TX1: U5.4 U8.23 | length 886.6
  Top Layer w16: 3910,765 4018.39,765 U8.23
  Top Layer w20: U5.4 3380,835 3450,765 3910,765
VCC-3V3: C25.1 C26.1 R1.2 R2.2 R3.2 R28.1 U8.35 U8.36 U12.2 | length 5735.4
  Top Layer w30: R28.1 v1(2810,430)
  Top Layer w40: U12.2@2035.83,685 2264.17,685 C25.1
  Bottom Layer w30: v1(2020,680) 2020,360 2066.26,313.74 C26.1 2763.74,313.74 2810,360 v1(2810,430) 3330,430 3546.06,213.94 U8.36 U8.35 4156.06,213.94 4235,135 6245,135 6295,185 R1.2 R2.2 R3.2
VCC-5V: C5.1 C21.1 C22.1 L6.2 P2.1 R14.2 R29.1 U3.8@6865,1503.15 U5.8 U12.3 U13.4 | length 17725.4
  Top Layer w20: v1(6855,1630) 6865,1620 U3.8@6865,1503.15
  Top Layer w30: v1(935,1630) 990,1630 1025,1595 1025,1260 1100,1185 1700,1185 ; C22.1 v1(1475,1015) ; v1(1725,1080) 1725,1160 1700,1185 ; v1(2110,1125) 2050,1185 1700,1185 ; v1(3895,1630) 3950,1630 3990,1590 3990,1290 4040,1240 4635,1240 4680,1285 v1(4820,1285) ; v1(5375,1630) 5440,1630 5470,1600 5470,1275 5530,1215 v1(5575,1215) 6405,1215 6440,1180 v1(6440,1005)
  Top Layer w40: U13.4 964.21,820.79 v1(965,820) ; v1(1165,950) C22.1 ; v1(1825,710) 1820,715 L6.2 1720,875 1775,930 2220,930 2264.17,885.83 U12.3 ; U5.8 2915,520 P2.1 2915,105 2955,65 6710,65 6945,300 v1(6945,1005) 6945,1590 6905,1630 v1(6855,1630)
  Bottom Layer w30: v1(1475,1015) 1690,1015 1725,1050 v1(1725,1080) ; v1(2110,1125) 2110,1375 2090,1395 2090,1650 2160,1720 2380,1720 2415,1685 v1(2415,1630) ; v1(4820,1285) 4820,1215 4860,1175 5375,1175 5415,1215 v1(5575,1215) ; v1(6440,1005) v1(6945,1005)
  Bottom Layer w40: v1(965,820) 1165,820 ; v1(1165,950) 1165,820 ; C21.1 1860,820 ; v1(2510,430) 2510,510 2535,535 ; U5.8 R14.2 2535,535 ; 1165,820 1860,820 ; 1860,820 2100,820 2140,780 2140,590 2195,535 2535,535
VCC-5V_1: C1.1@7810,1756.26 C2.1 L1.2@7195,2140 Q1.3@6937.72,2298.74 R4.1 VR1.3@7030,1580 | length 2327.6
  Top Layer w30: v1(6770,2380) 6920,2380 6937.72,2362.28 Q1.3@6937.72,2298.74
  Top Layer w60: Q1.3@6937.72,2298.74 7146.26,2298.74 7195,2250 7195,2140 7195,1635 7140,1580 VR1.3@7030,1580
  Bottom Layer w30: R4.1 v1(6770,2380) ; VR1.3@7030,1580 7030,1720 7066.26,1756.26 7810,1756.26 C2.1
VCC-5V_2: 
VCC-5V_3: 
VCC-5V_4: 
VCC-5V_5: 
VCC-12V: C3.1 C3_1.1 C4.1 C4_1.1 C6.1 C6_1.1 C19.1 C20.1 J10.1 pad.0@560,640 U1.1 U13.1 | length 20756.3
  Top Layer w50: U1.1@1655,1600 1955,1600 2020,1665 2020,2770 ; U1.1@3135,1600 3435,1600 3500,1665 3500,2770 ; U1.1@4615,1600 4915,1600 4980,1665 4980,2770 ; U1.1@6095,1600 6395,1600 6460,1665 6460,2770
  Top Layer w60: v1(495,1105) 295,1305 295,2475 590,2770 2020,2770 3500,2770 4980,2770 6460,2770 7905,2770 7970,2705 7970,2290 ; v1(845,510) 845,600 ; 7605,1600 7875,1600 7970,1695 7970,2290 ; C3.1 C4.1 C6.1 8245,2245 8200,2290 7970,2290
  Bottom Layer w60: C6_1.1 C4_1.1 C3_1.1 290,1310 v1(495,1105) 555,1045 555,510 C19.1 v1(845,510) 1380,510 1495,395 C20.1
VOUT_1: CF1.1@6745,1355 CF2.1@6870,1355 R8.1@6585,1695 R10.2@6585,1575 U8.10 | length 2906.7
  Top Layer w20: U8.10 5430,610 5540,720 6480,720 6555,795 6555,1375 6570,1390 6560,1400 v1(6560,1405)
  Top Layer w30: R8.1@6585,1695 6585,1575 6535,1575 6510,1550 6510,1450 6570,1390 6605,1355 6745,1355 CF2.1@6870,1355
VOUT_2: U8.11 | length 1167.5
  Top Layer w20: v1(5070,1410) 5070,1195 5140,1125 5220,1125 5245,1100 v1(5245,920)
  Bottom Layer w16: U8.11 5000,660 5115,660
  Bottom Layer w20: 5115,660 5215,660 5245,690 v1(5245,920)
VOUT_3: U8.12 | length 2148.7
  Top Layer w16: 4895,660 5000,660 U8.12
  Top Layer w20: v1(3590,1410) 3590,1215 3625,1180 4455,1180 4490,1145 v1(4490,935) ; v1(4490,730) 4640,730 4710,660 4895,660
  Bottom Layer w20: v1(4490,730) v1(4490,935)
VOUT_4: CF2.1@2430,1355 U8.13 | length 4240.3
  Top Layer w20: CF2.1@2430,1355 2495,1355 2525,1325 2525,1115 2565,1075 3655,1075 3670,1090 v1(3795,1090) ; v1(5480,955) v1(5480,1130)
  Bottom Layer w16: U8.13 5000,760 5100,760
  Bottom Layer w20: v1(3795,1090) 3870,1090 3910,1130 v1(5480,1130) ; 5100,760 5160,760 5175,775 5175,955 5195,975 5410,975 5430,955 v1(5480,955)
VOUT_5: U8.14 | length 4922.5
  Top Layer w16: 3910,965 4135,965 4150,950 v1(4210,950) ; 4890,760 5000,760 U8.14
  Top Layer w20: v1(635,1405) 635,1190 735,1090 1600,1090 1700,990 3655,990 3680,965 3910,965 ; v1(4210,790) 4690,790 4720,760 4890,760
  Bottom Layer w20: v1(4210,790) v1(4210,950)
XA_1: R12.1 U8.18 | length 3106.6
  Bottom Layer w20: U8.18 5545,1010 5685,1150 7820,1150 7865,1195 v1(7865,1290) R12.1
XA_2: U8.20 | length 2598.4
  Bottom Layer w20: U8.20 3967.32,1052.32 3995,1080 5535,1080 5650,1195 6365,1195 6385,1215 v1(6385,1290)
XA_3: U8.22 | length 1330.2
  Top Layer w16: U8.22 4016.26,865 4140,865
  Top Layer w20: 4140,865 4620,865 4660,905 4660,1180 4690,1210 4885,1210 4905,1230 v1(4905,1290)
XA_4: U8.26 | length 1029.9
  Bottom Layer w16: v1(3425,1290) 3425,1205 3515,1115 3515,775 3576.06,713.94 U8.26
XA_5: U8.31 | length 2991.4
  Bottom Layer w16: 3905,365 4018.39,365 U8.31
  Bottom Layer w20: v1(1945,1290) 1945,1045 1990,1000 3410,1000 3445,965 3445,415 3495,365 3905,365
pads on no net: C1.1@1890,1756.26 C1.1@3370,1756.26 C1.1@4850,1756.26 C1.1@6330,1756.26 C2_1.1 C2_2.1 C2_3.1 C2_4.1 C5_1.1 C5_2.1 C5_3.1 C5_4.1 C7_1.1 C7_2.1 C7_3.1 C7_4.1 C8.1 C9.1 C10.1 C11.1 C12.1 C13.1 C14.1 C15.1 C16.1 C17.1 CF1.1@825,1355 CF1.1@2305,1355 CF1.1@3785,1355 CF1.1@5265,1355 CF2.1@950,1355 CF2.1@3910,1355 CF2.1@5390,1355 CF5_1.1 CF5_2.1 CF5_3.1 CF5_4.1 CF6_1.1 CF6_2.1 CF6_3.1 CF6_4.1 D1.2 D2.2 D3.2 D4.2 D+_2.1 D+_2.2 D+_3.1 D+_3.2 D+_4.1 D+_4.2 D+_5.1 D+_5.2 J2.1@1470,2610 J2.1@2950,2610 J2.1@4430,2610 J2.1@5910,2610 J2.2@1670,2610 J2.2@3150,2610 J2.2@4630,2610 J2.2@6110,2610 J4.1@1070,2610 J4.1@2550,2610 J4.1@4030,2610 J4.1@5510,2610 L1.1@3115,2140 L1.1@4595,2140 L1.1@6075,2140 L1.2@2755,2140 L1.2@4235,2140 L1.2@5715,2140 L1_4.1 L1_4.2 Q1.1@1017.72,2130.24 Q1.1@2497.72,2130.24 Q1.1@3977.72,2130.24 Q1.1@5457.72,2130.24 Q1.2@730.32,2220 Q1.2@2210.32,2220 Q1.2@3690.31,2220 Q1.2@5170.31,2220 Q1.3@1017.72,2298.74 Q1.3@2497.72,2298.74 Q1.3@3977.72,2298.74 Q1.3@5457.72,2298.74 Q3.2@845,2575 Q3.2@2325,2575 Q3.2@3805,2575 Q3.2@5285,2575 Q3.3@845,2675 Q3.3@2325,2675 Q3.3@3805,2675 Q3.3@5285,2675 Q5.1@1890,2615 Q5.1@3370,2615 Q5.1@4850,2615 Q5.1@6330,2615 Q5.2@1890,2415 Q5.2@3370,2415 Q5.2@4850,2415 Q5.2@6330,2415 R4_1.1 R4_1.2 R4_2.1 R4_2.2 R4_3.1 R4_3.2 R4_4.1 R4_4.2 R6_1.1 R6_1.2 R6_2.1 R6_2.2 R6_3.1 R6_3.2 R6_4.1 R6_4.2 R6_5.1 R6_6.1 R6_7.1 R6_8.1 R8.1@665,1695 R8.1@2145,1695 R8.1@3625,1695 R8.1@5105,1695 R8.2@665,1780 R8.2@2145,1780 R8.2@3625,1780 R8.2@5105,1780 R10.2@665,1575 R10.2@2145,1575 R10.2@3625,1575 R10.2@5105,1575 R12_1.1 R12_1.2 R12_2.1 R12_2.2 R12_3.1 R12_3.2 R12_4.1 R12_4.2 U1.2@1585,1600 U1.2@3065,1600 U1.2@4545,1600 U1.2@6025,1600 U1.4@1445,1600 U1.4@2925,1600 U1.4@4405,1600 U1.4@5885,1600 U3.1@945,1739.37 U3.1@2425,1739.37 U3.1@3905,1739.37 U3.1@5385,1739.37 U3.2@895,1739.37 U3.2@2375,1739.37 U3.2@3855,1739.37 U3.2@5335,1739.37 U3.3@845,1739.37 U3.3@2325,1739.37 U3.3@3805,1739.37 U3.3@5285,1739.37 U3.4@795,1739.37 U3.4@2275,1739.37 U3.4@3755,1739.37 U3.4@5235,1739.37 U3.6@845,1503.15 U3.6@2325,1503.15 U3.6@3805,1503.15 U3.6@5285,1503.15 U3.7@895,1503.15 U3.7@2375,1503.15 U3.7@3855,1503.15 U3.7@5335,1503.15 U3.8@945,1503.15 U3.8@2425,1503.15 U3.8@3905,1503.15 U3.8@5385,1503.15 U8.1 U8.27 U8.32 VR1.2@1110,1480 VR1.2@2590,1480 VR1.2@4070,1480 VR1.2@5550,1480 VR1.3@1110,1580 VR1.3@2590,1580 VR1.3@4070,1580 VR1.3@5550,1580
copper on no net: | length 52570.5
  Top Layer w20: 665,1780 815,1780 ; v1(810,1630) 845,1595 845,1503.15 ; v1(895,1430) 895,1503.15 ; 935,1630 945,1620 945,1503.15 ; 2145,1780 2295,1780 ; v1(2290,1630) 2325,1595 2325,1503.15 ; v1(2375,1430) 2375,1503.15 ; 2415,1630 2425,1620 2425,1503.15 ; 3625,1780 3775,1780 ; v1(3770,1630) 3805,1595 3805,1503.15 ; v1(3855,1430) 3855,1503.15 ; 3895,1630 3905,1620 3905,1503.15 ; 5105,1780 5255,1780 ; v1(5250,1630) 5285,1595 5285,1503.15 ; v1(5335,1430) 5335,1503.15 ; 5375,1630 5385,1620 5385,1503.15
  Top Layer w30: 665,1695 665,1575 615,1575 590,1550 590,1450 650,1390 685,1355 825,1355 950,1355 ; v1(850,2380) 1000,2380 1017.72,2362.28 1017.72,2298.74 ; v1(930,2130) 930.24,2130.24 1017.72,2130.24 ; 1110,1480 1410,1480 1445,1515 1445,1600 ; 2145,1695 2145,1575 2095,1575 2070,1550 2070,1450 2130,1390 2165,1355 2305,1355 2430,1355 ; v1(2330,2380) 2480,2380 2497.72,2362.28 2497.72,2298.74 ; v1(2410,2130) 2410.24,2130.24 2497.72,2130.24 ; 2590,1480 2890,1480 2925,1515 2925,1600 ; 3625,1695 3625,1575 3575,1575 3550,1550 3550,1450 3610,1390 3645,1355 3785,1355 3910,1355 ; v1(3810,2380) 3960,2380 3977.72,2362.28 3977.72,2298.74 ; v1(3890,2130) 3890.24,2130.24 3977.72,2130.24 ; 4070,1480 4370,1480 4405,1515 4405,1600 ; 5105,1695 5105,1575 5055,1575 5030,1550 5030,1450 5090,1390 5125,1355 5265,1355 5390,1355 ; v1(5290,2380) 5440,2380 5457.72,2362.28 5457.72,2298.74 ; v1(5370,2130) 5370.24,2130.24 5457.72,2130.24 ; 5550,1480 5850,1480 5885,1515 5885,1600
  Top Layer w40: 779,1270 825,1270 ; v1(2259,1270) 2305,1270 ; 3739,1270 3785,1270 ; 5219,1270 5265,1270
  Top Layer w50: 1585,1600 1585,1810 ; 1585,1760 1585,1805 1635,1855 1635,1925 ; 1595,1820 1635,1860 1635,2075 ; 3065,1600 3065,1810 3090,1835 ; 3075,1820 3115,1860 3115,2075 ; 4545,1600 4545,1810 ; 4545,1785 4545,1810 ; 4555,1820 4595,1860 4595,2075 ; 4565,1830 4545,1810 ; 6025,1600 6025,1810 ; 6025,1785 6025,1810 ; 6035,1820 6075,1860 6075,2075 ; 6050,1835 6025,1810
  Top Layer w60: 730.32,1995.32 730.32,2220 ; 820,1755 825,1760 v1(825,1855) ; 920,1785 920,1840 ; 920,1970 920,1840 ; 1017.72,2298.74 1226.26,2298.74 1275,2250 1275,2140 1275,1635 1220,1580 1110,1580 ; v1(1140,1840) 920,1840 ; 1470,2610 1470,2470 1525,2415 1910,2415 ; 2210.32,1995.32 2210.32,2220 ; 2300,1755 2305,1760 v1(2305,1855) ; 2400,1785 2400,1840 ; 2400,1970 2400,1840 ; 2497.72,2298.74 2706.26,2298.74 2755,2250 2755,2140 2755,1635 2700,1580 2590,1580 ; v1(2620,1840) 2400,1840 ; 2950,2610 2950,2470 3005,2415 3390,2415 ; 3690.31,1995.32 3690.31,2220 ; 3780,1755 3785,1760 v1(3785,1855) ; 3880,1785 3880,1840 ; 3880,1970 3880,1840 ; 3977.72,2298.74 4186.26,2298.74 4235,2250 4235,2140 4235,1635 4180,1580 4070,1580 ; v1(4100,1840) 3880,1840 ; 4430,2610 4430,2470 4485,2415 4870,2415 ; 5170.31,1995.32 5170.31,2220 ; 5260,1755 5265,1760 v1(5265,1855) ; 5360,1785 5360,1840 ; 5360,1970 5360,1840 ; 5457.72,2298.74 5666.26,2298.74 5715,2250 5715,2140 5715,1635 5660,1580 5550,1580 ; v1(5580,1840) 5360,1840 ; 5910,2610 5910,2470 5965,2415 6350,2415
  Bottom Layer w20: 575,1270 575,1425 ; 575,1380 575,2495 650.16,2570.16 650.16,2675 ; 690,1270 690,1334 710,1354 780,1354 895,1354 ; v1(895,1430) 895,1354 ; 910,1354 895,1354 ; 1945,1290 1945,1410 ; 2045,1270 2045,1675 2080,1710 ; 2080,1750 2080,1710 ; 2126.56,2675 2135,2666.56 2135,2550 2080,2495 2080,1710 ; 2170,1270 2170,1334 2190,1354 2260,1354 2375,1354 ; v1(2375,1430) 2375,1354 ; 2390,1354 2375,1354 ; 3425,1290 3425,1410 ; 3515,1270 3515,1440 3525,1450 3555,1480 3555,1575 ; 3555,1535 3555,2495 3620,2560 3620,2645 3610,2655 ; 3650,1270 3650,1334 3670,1354 3740,1354 3855,1354 ; v1(3855,1430) 3855,1354 ; 3870,1354 3855,1354 ; 4905,1290 4905,1410 ; 5000,1270 5000,1430 5035,1465 5035,1575 ; 5035,1515 5035,2465 5095,2525 5095,2675 ; 5130,1270 5130,1334 5150,1354 5220,1354 5335,1354 ; v1(5335,1430) 5335,1354 ; 5350,1354 5335,1354 ; 6385,1290 6385,1410
  Bottom Layer w30: v1@825,2380 v1(850,2380) ; 845,2575 755,2575 740,2560 740,2380 740,2160 770,2130 v1(930,2130) ; 945,2560 945,2675 ; 1110,1580 1110,1720 1146.26,1756.26 1890,1756.26 1890,1805 ; 1830,1495 1945,1495 1945,1645 2010,1710 2010,2600 1995,2615 1890,2615 ; v1@2305,2380 v1(2330,2380) ; 2325,2575 2235,2575 2220,2560 2220,2380 2220,2160 2250,2130 v1(2410,2130) ; 2425,2560 2425,2675 ; 2590,1580 2590,1720 2626.26,1756.26 3370,1756.26 3370,1805 ; 3310,1495 3425,1495 3425,1570 3490,1635 3490,2600 3475,2615 3370,2615 ; v1@3785,2380 v1(3810,2380) ; 3805,2575 3715,2575 3700,2560 3700,2380 3700,2160 3730,2130 v1(3890,2130) ; 3905,2560 3905,2675 ; 4070,1580 4070,1720 4106.26,1756.26 4850,1756.26 4850,1805 ; 4790,1495 4905,1495 4905,1570 4970,1635 4970,2600 4955,2615 4850,2615 ; v1@5265,2380 v1(5290,2380) ; 5285,2575 5195,2575 5180,2560 5180,2380 5180,2160 5210,2130 v1(5370,2130) ; 5385,2560 5385,2675 ; 5550,1580 5550,1720 5586.26,1756.26 6330,1756.26 6330,1805 ; 6270,1495 6385,1495 6385,1570 6450,1635 6450,2600 6435,2615 6330,2615 ; 6865,2560 6865,2675
  Bottom Layer w40: 740,2675 845,2675 ; 792.5,2675 940,2675 ; 1110,1380 1112.48,1377.52 ; 2220,2675 2325,2675 ; 2272.5,2675 2415,2675 ; 2590,1380 2592.48,1377.52 ; 3700,2675 3805,2675 ; 3752.5,2675 3900,2675 ; 3895,1545 3945,1545 ; 4070,1380 4072.48,1377.52 ; 5180,2675 5285,2675 ; 5232.5,2675 5380,2675 ; 5550,1380 5552.48,1377.52
  Bottom Layer w60: v1(825,1855) 1020,1855 1070,1905 1070,2610 ; v1(1140,1840) 1165,1840 1215,1890 ; 1398.74,1913.74 1470,1913.74 ; 1670,2610 1670,2400 1635,2365 1255,2365 1215,2325 ; v1(2305,1855) 2500,1855 2550,1905 2550,2610 ; v1(2620,1840) 2645,1840 2695,1890 ; 2878.74,1913.74 2935,1913.74 ; 3150,2610 3150,2400 3115,2365 2735,2365 2695,2325 ; v1(3785,1855) 3980,1855 4030,1905 4030,2610 ; v1(4100,1840) 4125,1840 4175,1890 ; 4358.74,1913.74 4400,1913.74 ; 4630,2610 4630,2400 4595,2365 4215,2365 4175,2325 ; v1(5265,1855) 5460,1855 5510,1905 5510,2610 ; v1(5580,1840) 5605,1840 5655,1890 ; 6110,2610 6110,2400 6075,2365 5695,2365 5655,2325 ; 1215,1890 1215,2325 ; 1215,1890 1215,2325 ; 2695,1890 2695,2325 ; 2695,1890 2695,2325 ; 4175,1890 4175,2325 ; 4175,1890 4175,2325 ; 5655,1890 5655,2325 ; 5655,1890 5655,2325
  other v1: 1590,2150 1675,2150 3070,2150 3155,2150 4550,2150 4635,2150 6030,2150 6115,2150 1590,2210 1675,2210 3070,2210 3155,2210 4550,2210 4635,2210 6030,2210 6115,2210

## Polygon pours and split planes (outlines as drawn)
GND on Bottom Layer "NONET_L-01_P-001" (solid, remove dead copper, pour order 0): 0,2835 8360,2835 8360,0 0,0
GND on Top Layer "NONET_L-01_P-001" (solid, remove dead copper, pour order 2): 0,2840 8360,2840 8360,5 0,5

## Keep-outs
Keep-Out Layer:
  the board outline again, w10

## Other copper
Top Layer:
  rectangle net NetJ4_1: 6710,1720 6775,1795
  rectangle net NetD+_1_2: 6810,1720 6870,1785
  rectangle: 5330,1720 5390,1785
  rectangle: 5230,1720 5295,1795
  rectangle: 3850,1720 3910,1785
  rectangle: 3750,1720 3815,1795
  rectangle: 2370,1720 2430,1785
  rectangle: 2270,1720 2335,1795
  rectangle: 890,1720 950,1785
  rectangle: 790,1720 855,1795
  rectangle net VCC-12V: 760,590 920,640
  rectangle net GND: 1050,835 1110,905

## Silkscreen, mask and mechanical layers (free items; w line width, h text height)
Top Overlay:
  lines w10: 2040,1200 2040,2810 ; 2040,1200 3520,1200 ; 2040,1200 560,1200 560,2810 2040,2810 ; 2040,1200 2040,2810 ; 2040,2810 3520,2810 ; 3520,1200 3520,2810 ; 3520,1200 5000,1200 ; 3520,1200 3520,2810 ; 3520,2810 5000,2810 ; 5000,1200 5000,2810 ; 5000,1200 6480,1200 ; 5000,1200 5000,2810 ; 5000,2810 6480,2810 ; 6480,1200 7960,1200 7960,2810 6480,2810 ; 6480,1200 6480,2810 ; 6480,1200 6480,2810
Top Solder:
  lines w60: 495,1105 295,1305 295,2475 590,2770 2020,2770 3500,2770 4980,2770 6460,2770 7905,2770
Bottom Solder:
  lines w60: 290,1390 290,1750 290,2100 ; 495,1105 555,1045 ; 760,215 760,110 805,65 ; 925,2775 1300,2775 7130,2775 7915,2775 8010,2680 8010,2390 8087.52,2312.48 8087.52,2035 8087.52,1685 8087.52,1325 8087.52,792.52 7365,70 6355,70 6325,70 ; 945,2770 510,2770 425,2685 425,2580 132.52,2287.52 132.52,2105 132.52,1755 132.52,1395 132.52,832.48 206.14,758.86 291.14,758.86 361.14,758.86 361.14,98.86 395,65 805,65 ; 3015,65 6310,65 ; 3015,70 2390,70 2298.74,161.26 2220,161.26 1860,161.26 1495,161.26 1401.26,161.26 1305,65 805,65

## Text inside footprints (layer, text, board x,y; h text height)
U3: Top Overlay "DS1307" at 975,1610 h40 r180
U3: Top Overlay "DS1307" at 2455,1610 h40 r180
U3: Top Overlay "DS1307" at 3935,1610 h40 r180
U3: Top Overlay "DS1307" at 5192.5,1595 h40
U3: Top Overlay "DS1307" at 6895,1610 h40 r180
U12: Top Overlay "1117" at 2170,605 h50 r90
U13: Top Overlay "LM2576" at 450,590 h50 r90